# Altium PCB NapajanjeMaliRobot2.0v.PcbDoc
Units mil, origin at the board's own origin, x right, y up, seen from the top; angles counter-clockwise.
Board outline 2950 x 1950 mil, 2 copper layers (Top Layer, Bottom Layer); 20 components, 10 nets, 74 pads, 0 vias.
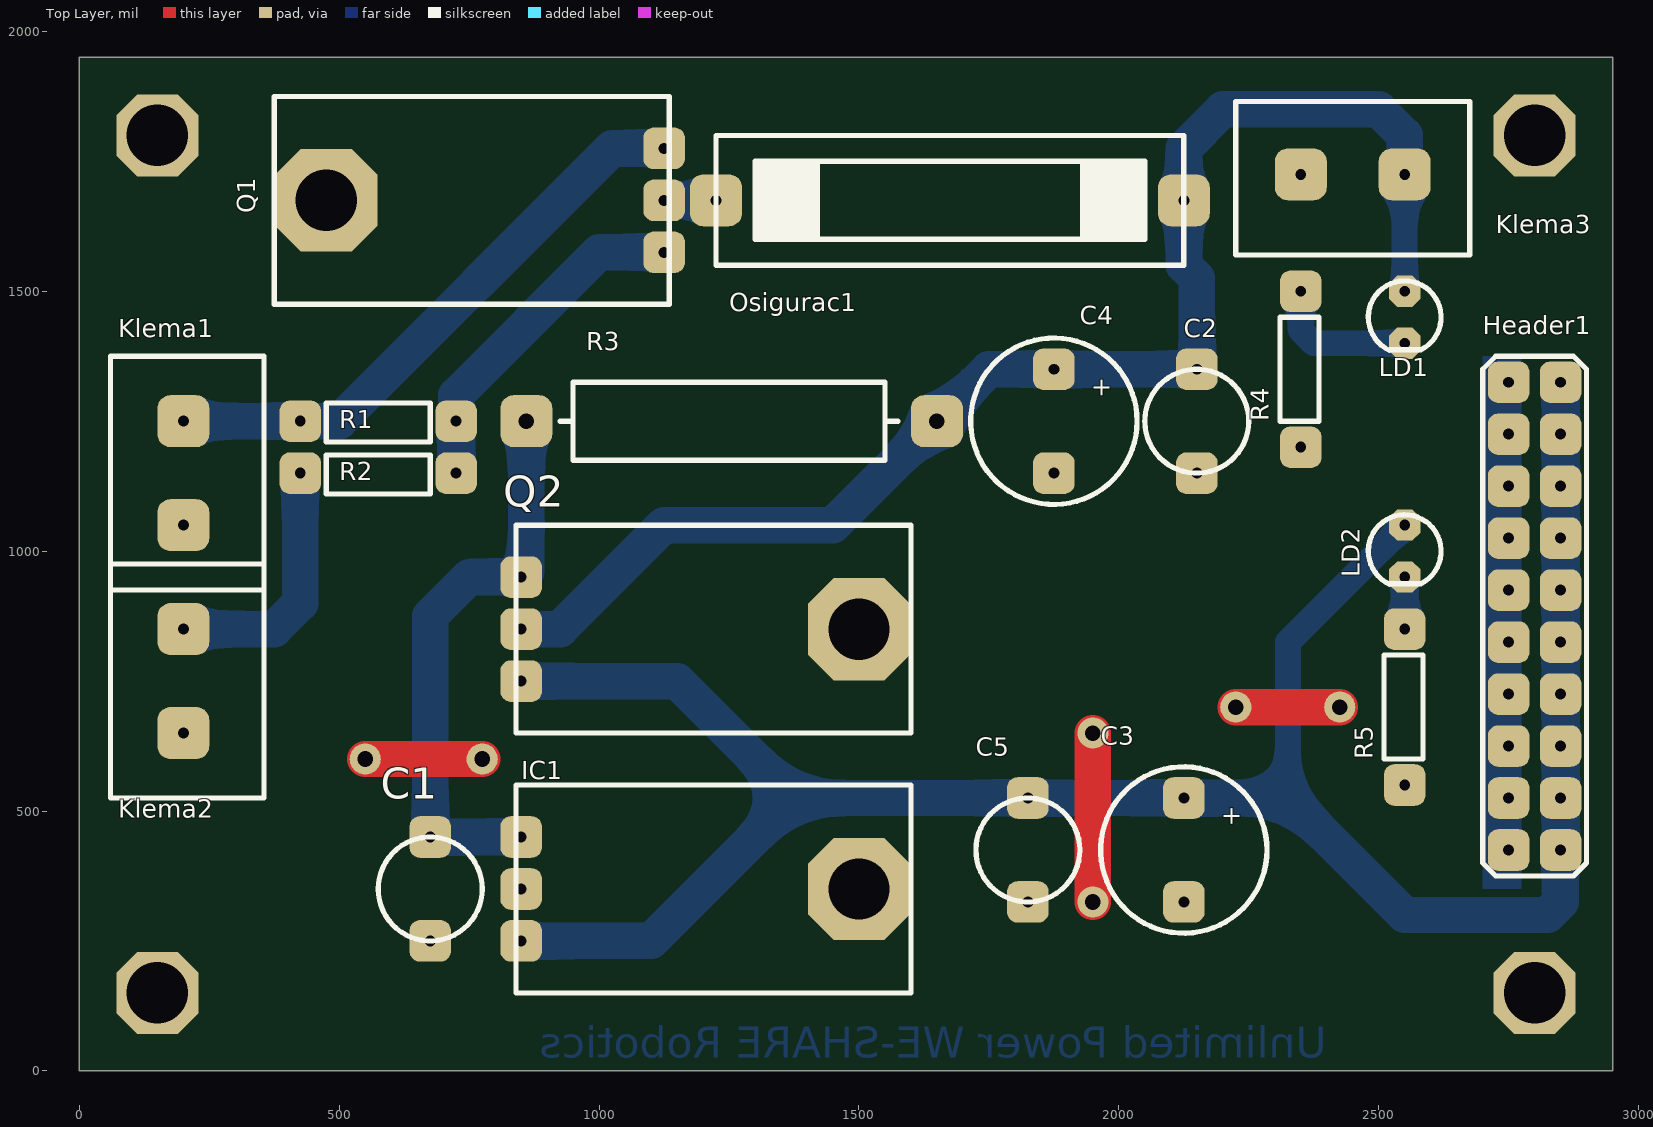
[diagram p0: Top Layer view]
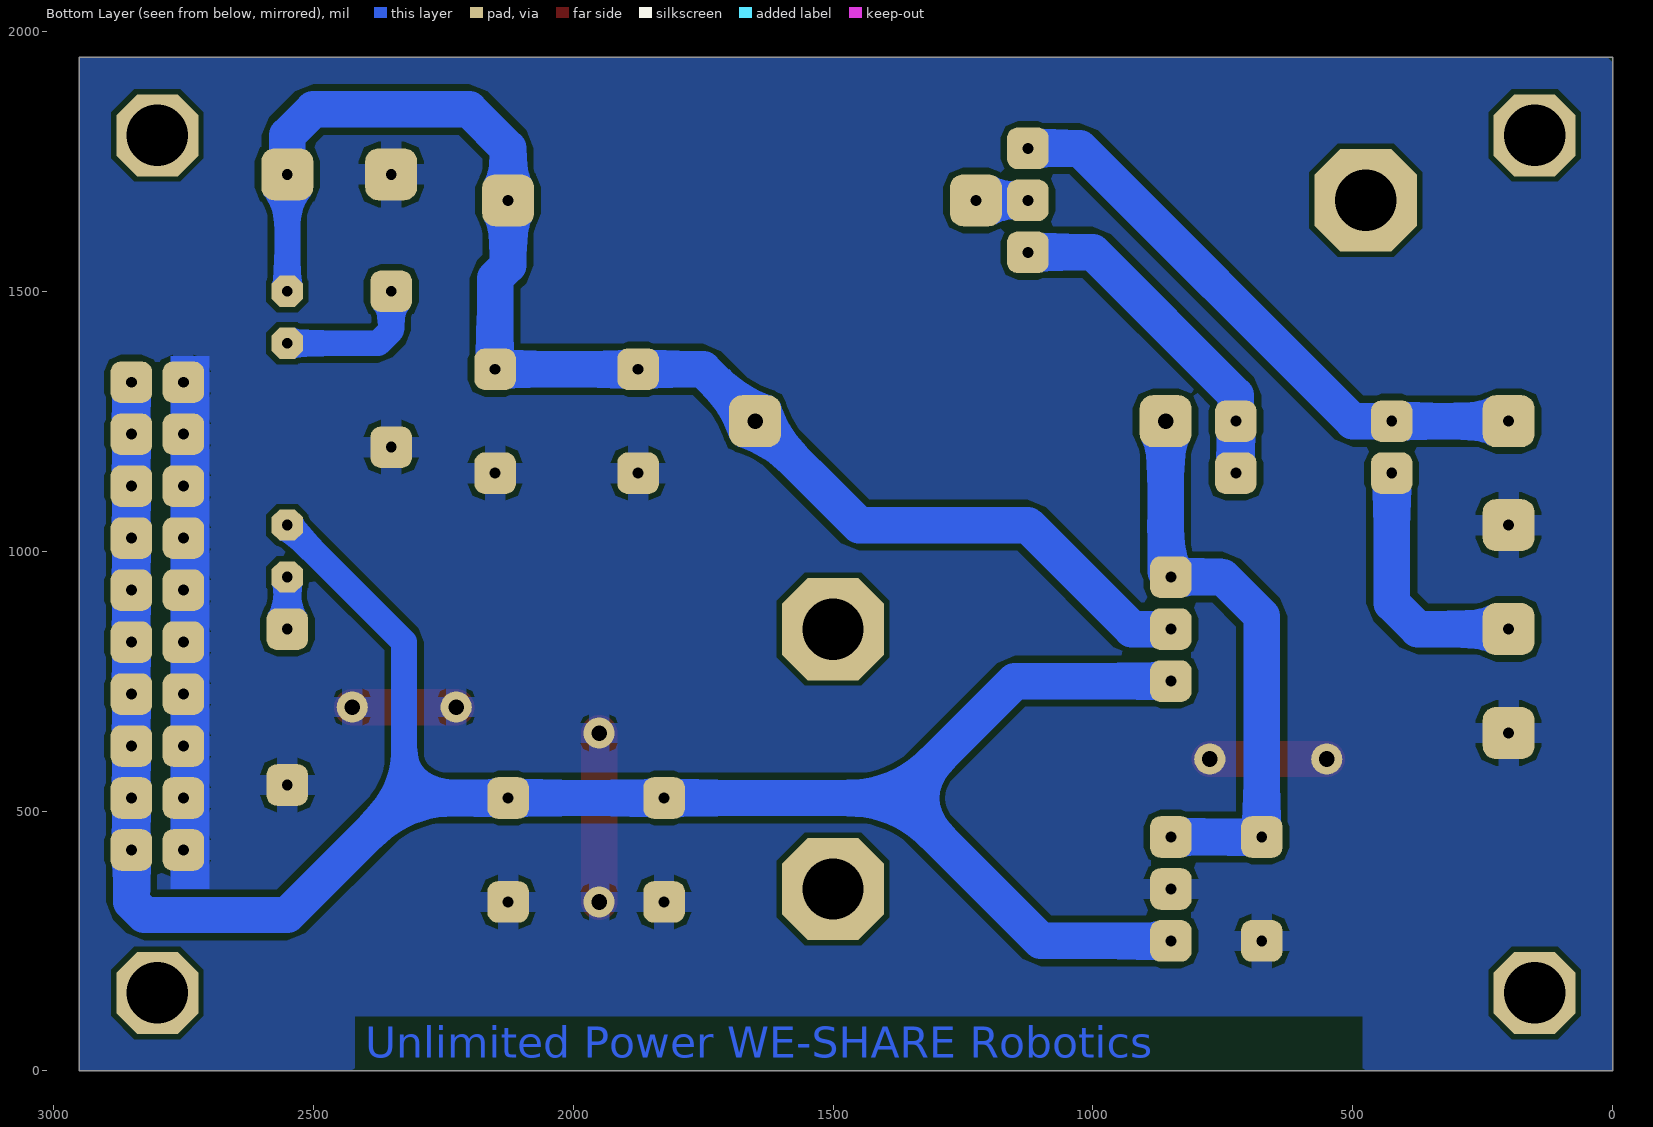
[diagram p1: Bottom Layer view, seen from below]
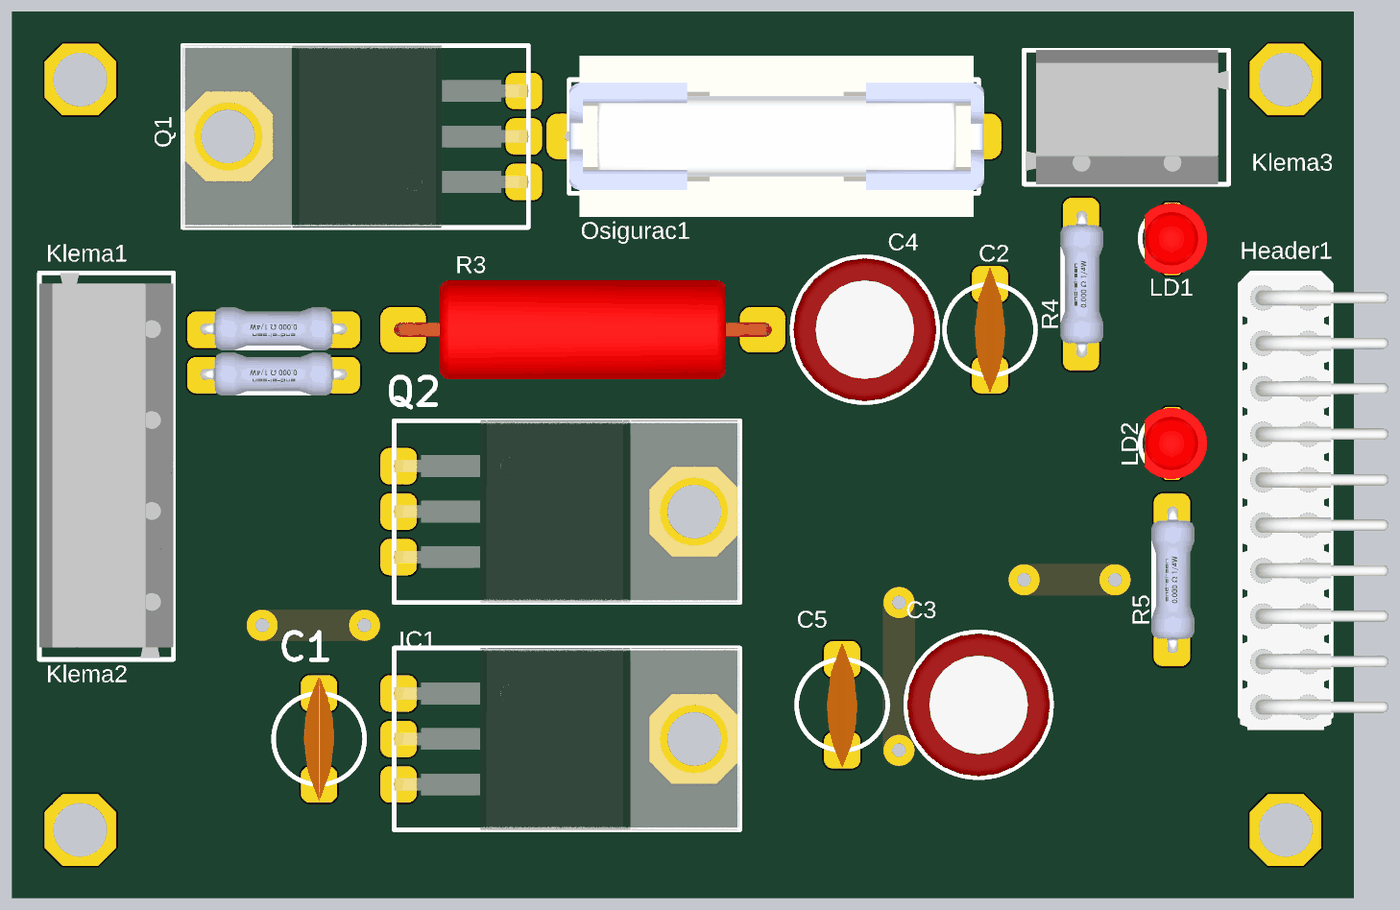
[diagram p2: 3D render of the assembled board from above, using the file's embedded part models]

## Layer stack, top to bottom
Top Solder: solder mask 0.4, Solder Resist, Dk 3.5
Top Layer: signal copper 1.4
Dielectric 1: dielectric 12.6, FR-4, Dk 4.8
Bottom Layer: signal copper 1.4
Bottom Solder: solder mask 0.4, Solder Resist, Dk 3.5

## Board outline
0,0 0,1950 2950,1950 2950,0

## Design rules (kind name [scope] priority, off if disabled: settings)
Clearance [All] p1: gap=10
PlaneClearance [All] p1: clearance=30
PlaneConnect [All] p1: planeconnectstyle=Relief reliefexpansion=20 reliefentries=4 reliefconductorwidth=50 reliefairgap=20
PolygonConnect [All] p1: connectstyle=Relief reliefconductorwidth=40 reliefentries=4 polygonreliefangle="90 Angle" airgapwidth=10
RoutingVias [All] p1: holewidth=28 width=50 viastyle="Through Hole" minholewidth=28 minwidth=50 maxholewidth=28 maxwidth=50
SolderMaskExpansion [All] p1: expansion=4
UnpouredPolygon [All] p1: allowunpoured=FALSE
Width [All] p1: maxlimit=70 minlimit=20 preferedwidth=50 minimp=50.000000 maximp=50.000000 favimp=50.000000
27 further rules are at their usual default settings.

## Components (designator, comment, footprint, x,y, rotation, side; value= is the part's Value field where it differs from the comment)
C1 "C1" C1(ceramic) 675,250 r90 top
C2 "C1" C1(ceramic) 2150,1350 r270 top
C3 "C2" C2(elektrolit) 2125,525 r270 top
C4 "C2" C2(elektrolit) 1875,1350 r270 top
C5 "C1" C1(ceramic) 1825,525 r270 top
Header1 "Header2x10" HEADER2x10 2850,425 r90 top
IC1 "7805" TO220_Savijeni 850,450 r270 top
Klema1 "Baterija" Klema 200,1050 r90 top
Klema2 "Taster" Klema 200,650 r90 top
Klema3 "H-Bridge" Klema 2350,1725 r0 top
LD1 "LED" LED(3mm) 2550,1500 r270 top
LD2 "LED" LED(3mm) 2550,1050 r270 top
Osigurac1 "FUSE" Osigurac 1225,1675 r0 top
Q1 "IRF4905" TO220_Savijeni 1125,1575 r90 top
Q2 "BD912" TO220_Savijeni 850,950 r270 top
R1 "10k" R1(300milsa) 725,1250 r180 top
R2 "10k" R1(300milsa) 725,1150 r180 top
R3 "2W" R1(2W) 1650,1250 r180 top
R4 "R1" R1(300milsa) 2350,1200 r90 top
R5 "R1" R1(300milsa) 2550,550 r90 top

## Footprints (in the part's own frame and the unit in brackets; to place one, negate y for a bottom-side part, rotate by r counter-clockwise, add the part's x,y. Pads: shape width x height; smd on the part's side, far side on the other; paste and mask are expansions set on the pad)
C1(ceramic) [mil]
  rrect50% 80x80 hole 21: 1(0,0) 2(200,0)
  silkscreen extent 0,-100 200,100, body extent -37,-33 238,33, height 258
C2(elektrolit) [mil]
  rrect50% 80x80 hole 21: 1(0,0) 2(200,0)
  silkscreen extent -60,-160 260,160, body extent -57,-157 257,157, height 522
HEADER2x10 [mil]
  rrect50% 80x80 hole 21: 1(0,0) 2(0,100) 3(100,0) 4(100,100) 5(200,0) 6(200,100) 7(300,0) 8(300,100) 9(400,0) 10(400,100) 11(500,0) 12(500,100) 13(600,0) 14(600,100) 15(700,0) 16(700,100) 17(800,0) 18(800,100) 19(900,0) 20(900,100)
  silkscreen extent -50,-50 950,150, body extent -55,-176 945,150, height 294
Klema [mil]
  rrect50% 100x100 hole 21: 1(0,0) 2(200,0)
  silkscreen extent -125,-155 325,140, body extent -122,-155 325,140, height 392
LED(3mm) [mil]
  oct 60x60 hole 21: 1(0,0) 2(100,0)
  silkscreen extent -20,-70 114,70, body extent -28,-60 128,77, height 212
Osigurac [mil]
  rrect50% 100x100 hole 21: 1(0,0) 2(900,0)
  silkscreen extent 0,-125 900,125, body extent 0,-177 912,177, height 492
R1(2W) [mil]
  rrect50% 100x100 hole 30: 1(0,0) 2(790,0)
  silkscreen extent 75,-75 725,75, body extent -21,-108 811,108, height 208
R1(300milsa) [mil]
  rrect50% 80x80 hole 21: 1(0,0) 2(300,0)
  silkscreen extent 50,-35 250,40, body extent -12,-49 312,45, height 95
TO220_Savijeni [mil]
  oct 196.85x196.85 hole 118.11: 0(100,650)
  rrect50% 80x80 hole 21: 1(0,0) 2(100,0) 3(200,0)
  silkscreen extent -100,-10 300,750, body extent -100,-10 300,750, height 175

## Part data
Klema1 Klema2 Klema3: library part Klema
Q1: library part "P-Channel MOSFET"
Q2: library part "Transistor PNP"
R1 R2 R3: library part R1

## Free pads (board coordinates)
  oct 157.48x157.48 hole 118.11: 0(150,150) 0(150,1800) 0(2800,150) 0(2800,1800)
  round 60 hole 30: 0(775,600) 1(550,600) 1(1950,325) 2(1950,650) 3(2425,700) 4(2225,700)

## Nets (pads, with @x,y where several pads share a name; then routed paths per layer and width w, separated by ;. In a path a pad name is that pad's centre, name@x,y a point inside that pad or via, vN(x,y) a via of type N, cw(c..) or ccw(c..) an arc to the next point about the centre after c; other vN are vias at no path point)
GND: C1.1 C2.2 C3.2 C4.2 C5.2 Header1.2 Header1.4 Header1.6 Header1.8 Header1.10 Header1.12 Header1.14 Header1.16 Header1.18 Header1.20 IC1.2 Klema1.1 Klema2.1 Klema3.1 pad.0@775,600 pad.1 pad.2 pad.3 pad.4 R4.1 R5.1 | length 750
  Top Layer w70: pad.1@550,600 pad.0@775,600 ; pad.1@1950,325 pad.2 ; pad.4 pad.3
NetC1_2: C1.2 IC1.1 Q2.1 R3.2 | length 1110.2
  Bottom Layer w70: IC1.1 C1.2 675,875 750,950 Q2.1 860,960 R3.2
NetC2_1: C2.1 C4.1 Klema3.2 LD1.1 Osigurac1.2 Q2.2 R3.1 | length 2719.2
  Bottom Layer w50: LD1.1 Klema3.2
  Bottom Layer w70: Q2.2 925,850 1125,1050 1450,1050 R3.1 1750,1350 C4.1 C2.1 2150,1525 2125,1550 Osigurac1.2 2125,1775 2200,1850 2500,1850 2550,1800 Klema3.2
NetC3_1: C3.1 C5.1 Header1.1 Header1.3 Header1.5 Header1.7 Header1.9 Header1.11 Header1.13 Header1.15 Header1.17 Header1.19 IC1.3 LD2.1 Q2.3 | length 4453.9
  Bottom Layer w50: 2325,525 2325,825 LD2.1
  Bottom Layer w70: IC1.3 1100,250 1375,525 ; Q2.3 1150,750 1375,525 ; Header1.19 Header1.17 Header1.15 Header1.13 Header1.11 Header1.9 Header1.7 Header1.5 Header1.3 Header1.1 2850,325 2825,300 2550,300 2325,525 C3.1 C5.1 1375,525
NetKlema1_2: Klema1.2 Q1.3 R1.2 | length 1142.5
  Bottom Layer w70: Klema1.2 R1.2 500,1250 1025,1775 Q1.3
NetKlema2_2: Klema2.2 R2.2 | length 495.7
  Bottom Layer w70: Klema2.2 375,850 425,900 R2.2
NetLD1_2: LD1.2 R4.2 | length 285.4
  Bottom Layer w50: R4.2 2350,1425 2375,1400 LD1.2
NetLD2_2: LD2.2 R5.2 | length 100
  Bottom Layer w50: R5.2 LD2.2
NetOsigurac1_1: Osigurac1.1 Q1.2 | length 100
  Bottom Layer w70: Q1.2 Osigurac1.1
NetQ1_1: Q1.1 R1.1 R2.1 | length 663.9
  Bottom Layer w70: R2.1 R1.1 725,1300 1000,1575 Q1.1
pads on no net: IC1.0 Q1.0 Q2.0

## Polygon pours and split planes (outlines as drawn)
GND on Bottom Layer "Bottom Layer-gnd" (solid, remove dead copper, pour order 6): 0,1950 2950,1950 2950,0 0,0

## Other copper
Bottom Layer:
  rectangle net GND: 2700,350 2775,1375
  text "Unlimited Power WE-SHARE Robotics" at 2400,25 h60

## Silkscreen, mask and mechanical layers (free items; w line width, h text height)
Mechanical 1:
  the board outline again, w10

## Text inside footprints (layer, text, board x,y; h text height)
C3: Top Overlay "+" at 2190,510 h60 r270
C4: Top Overlay "+" at 1940,1335 h60 r270